# Allegro board slm.brd
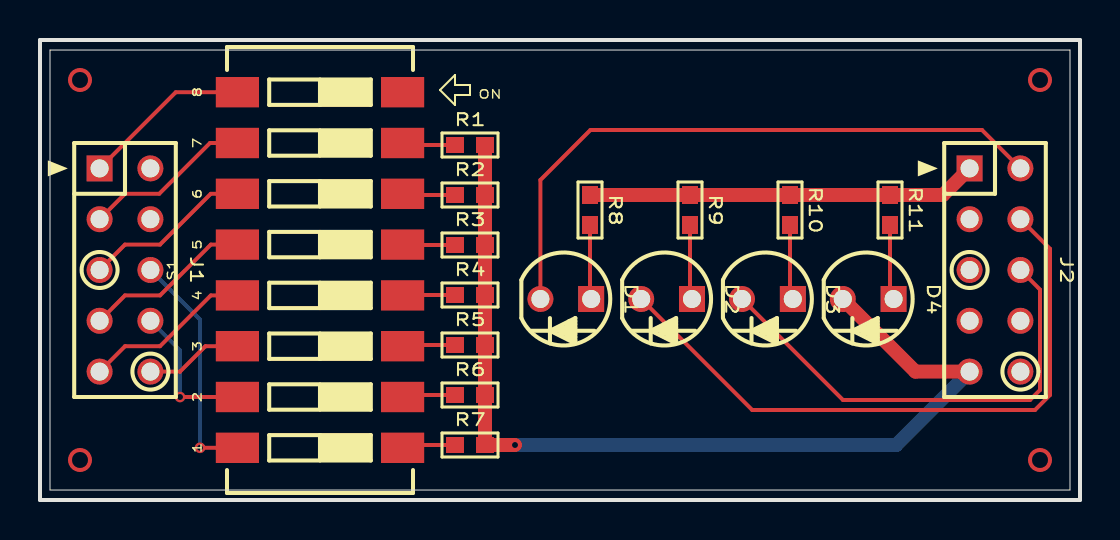
[diagram p0: board, top side]
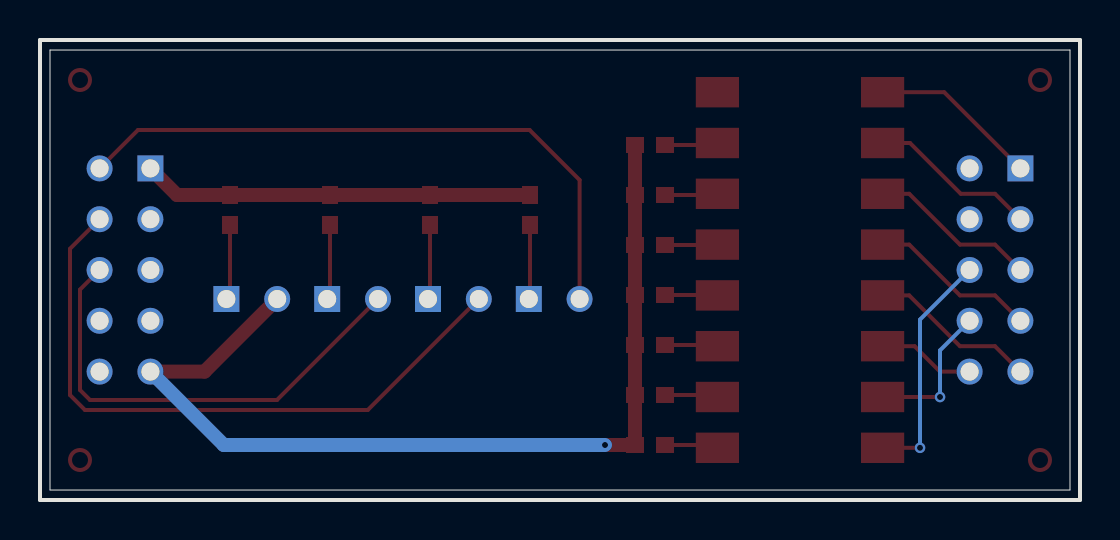
[diagram p1: board, bottom side, seen from below]

Outline 52 x 23 mm; copper layers: TOP, BOTTOM. Coordinates in mm from the lower left corner of the outline.
Outline path: 0,23 0,0 52,0 52,23 0,23 ; 0.5,22.5 51.5,22.5 51.5,0.5 0.5,0.5 0.5,22.5

## Placement (name value [footprint] x y rotation side)
D1  -  [LED_3MM]  26.29 10.05 270 top
D2  -  [LED_3MM]  31.33 10.05 270 top
D3  -  [LED_3MM]  36.37 10.05 270 top
D4  -  [LED_3MM]  41.41 10.05 270 top
J1  -  [76342-305LF]  4.25 11.5 270 top
J2  -  [76342-305LF]  47.75 11.5 270 top
NOREF  -  []  50 21 0 top
NOREF#2  -  []  50 2 0 top
NOREF#3  -  []  2 21 0 top
NOREF#4  -  []  2 2 0 top
R1  -  [RC1608]  21.5 17.75 0 top
R2  -  [RC1608]  21.5 15.25 0 top
R3  -  [RC1608]  21.5 12.75 0 top
R4  -  [RC1608]  21.5 10.25 0 top
R5  -  [RC1608]  21.5 7.75 0 top
R6  -  [RC1608]  21.5 5.25 0 top
R7  -  [RC1608]  21.5 2.75 0 top
R8  -  [RC1608]  27.5 14.5 270 top
R9  -  [RC1608]  32.5 14.5 270 top
R10  -  [RC1608]  37.5 14.5 270 top
R11  -  [RC1608]  42.5 14.5 270 top
S1  -  [ADE08S04]  14 11.5 90 top

## Library data of the parts
D1-D4 = TLHR4405: alternate symbols: (B:LED_3MM_ALT)
J1 J2 = 76342-305LF: alternate symbols: (B:76342-305LF_ALT)
R1-R7 = 1K: alternate symbols: (B:RC1608_ALT)
R8-R11 = 330: alternate symbols: (B:RC1608_ALT)
S1 = ADE08S04: alternate symbols: (B:ADE08S04_ALT)

## Footprints (pads in the part's own frame, mm; a bottom-side part is the same pattern mirrored in y, then rotated)
76342-305LF
  rect 1.3x1.3 hole 0.9: 1(-5.08,-1.27)
  round 1.3 hole 0.9: 2(-5.08,1.27) 3(-2.54,-1.27) 4(-2.54,1.27) 5(0,-1.27) 6(0,1.27) 7(2.54,-1.27) 8(2.54,1.27) 9(5.08,-1.27) 10(5.08,1.27)
ADE08S04
  rect 1.52x2.16 smd: 1(-8.89,4.13) 2(-6.35,4.13) 3(-3.81,4.13) 4(-1.27,4.13) 5(1.27,4.13) 6(3.81,4.13) 7(6.35,4.13) 8(8.89,4.13) 9(8.89,-4.13) 10(6.35,-4.13) 11(3.81,-4.13) 12(1.27,-4.13) 13(-1.27,-4.13) 14(-3.81,-4.13) 15(-6.35,-4.13) 16(-8.89,-4.13)
LED_3MM
  rect 1.3x1.3 hole 0.9: 1(0,1.27)
  round 1.3 hole 0.9: 2(0,-1.27)
RC1608
  rect 0.9x0.8 smd: 1(-0.75,0) 2(0.75,0)

## Nets
5VL1: J2.1 R8.1 R9.1 R10.1 R11.1
GND: D4.2 J2.9 R1.2 R2.2 R3.2 R4.2 R5.2 R6.2 R7.2
PB4: D1.2 J2.2
PB5: D2.2 J2.4
PB6: D3.2 J2.6
PF1: J1.3 S1.7
PF2: J1.5 S1.6
PF3: J1.7 S1.5
PF4: J1.9 S1.4
PF5: J1.10 S1.3
PF6: J1.8 S1.2
PF7: J1.6 S1.1
N10957707: D1.1 R8.2
N16717313: D2.1 R9.2
N16717401: D3.1 R10.2
N16717491: D4.1 R11.2
N16719047: J1.1 S1.8
N16720611: R7.1 S1.16
N16720615: R6.1 S1.15
N16720619: R5.1 S1.14
N16720623: R4.1 S1.13
N16720627: R3.1 S1.12
N16720631: R2.1 S1.11
N16720635: R1.1 S1.10

Pads without a net: J1 2 4; J2 3 5 7 8 10; S1 9

## Via types
v1: diameter 0.53, hole 0.3, TOP to BOTTOM, 3 vias

## Routing (per net, layer and track width the routed paths; a pad name or vN(x,y) marks a point on that pad's centre or on a via; arc(x,y) is an arc through that point)
5VL1: length 19.5
  TOP w0.7: J2.1 45.15,15.25 R11.1 R10.1 R9.1 R8.1
GND: length 48.6
  TOP w0.7: v1(23.75,2.75) R7.2 R6.2 R5.2 R4.2 R3.2 R2.2 R1.2 ; D4.2 43.77,6.42 J2.9
  BOTTOM w0.7: J2.9 42.81,2.75 v1(23.75,2.75)
PB4: length 31.8
  TOP w0.2: D1.2 25.02,16 27.52,18.5 47.1,18.5 J2.2
PB5: length 32.5
  TOP w0.2: J2.4 50.5,12.56 50.5,5.25 49.75,4.5 35.61,4.5 D2.2
PB6: length 23.6
  TOP w0.2: D3.2 40.15,5 49.5,5 50,5.5 50,10.52 J2.6
PF1: length 8.5
  TOP w0.2: J1.3 4.25,15.31 5.96,15.31 8.5,17.85 S1.7
PF2: length 8.5
  TOP w0.2: J1.5 4.25,12.77 6,12.77 8.54,15.31 S1.6
PF3: length 8.5
  TOP w0.2: J1.7 4.25,10.23 6,10.23 8.54,12.77 S1.5
PF4: length 8.5
  TOP w0.2: S1.4 8.54,10.23 6,7.69 4.25,7.69 J1.9
PF5: length 4.9
  TOP w0.2: S1.3 8.27,7.69 7,6.42 J1.10
PF6: length 7.3
  TOP w0.2: v1(7,5.15) S1.2
  BOTTOM w0.2: J1.8 7,7.48 v1(7,5.15)
PF7: length 11.8
  TOP w0.2: v1(8,2.61) S1.1
  BOTTOM w0.2: J1.6 8,9.02 v1(8,2.61)
N10957707: length 3.8
  TOP w0.2: R8.2 27.5,10.05 D1.1
N16717313: length 3.8
  TOP w0.2: R9.2 32.5,10.05 D2.1
N16717401: length 3.8
  TOP w0.2: D3.1 37.5,10.05 R10.2
N16717491: length 3.9
  TOP w0.2: D4.1 42.5,10.05 R11.2
N16719047: length 8.5
  TOP w0.2: S1.8 6.79,20.39 J1.1
N16720611: length 2.8
  TOP w0.2: R7.1 18.13,2.75 S1.16
N16720615: length 2.7
  TOP w0.2: R6.1 18.13,5.25 S1.15
N16720619: length 2.7
  TOP w0.2: R5.1 18.13,7.75 S1.14
N16720623: length 2.6
  TOP w0.2: R4.1 18.13,10.25 S1.13
N16720627: length 2.6
  TOP w0.2: R3.1 18.13,12.75 S1.12
N16720631: length 2.7
  TOP w0.2: S1.11 18.13,15.25 R2.1
N16720635: length 2.7
  TOP w0.2: R1.1 18.13,17.75 S1.10

## Text on the board
Ref Des/Silkscreen Top: ON
User.22: LAYER_1 | LAYER_2 | SILK_1 | MASK_1 | COMP_SIDE | SOLD_SIDE | MASK_2 | SILK_2 | 2LAYER STACKUP | Layers | T | OZ | PCB Layer | PCB Thickness | Copper Thickness | Material Type | 02 | 1.6 | X.X | FR-4 | PCB Specification
